# Altium PCB MainBoard.PcbDoc (part 2 of 2)
Units mil, origin at the board's own origin, x right, y up, seen from the top; angles counter-clockwise.
Board outline 6299.21 x 9187 mil, 4 copper layers (Component Side, Ground Plane, Power Plane, Solder Side), stack 33.234 mil thick; 72 components, 164 nets, 727 pads, 131 vias.
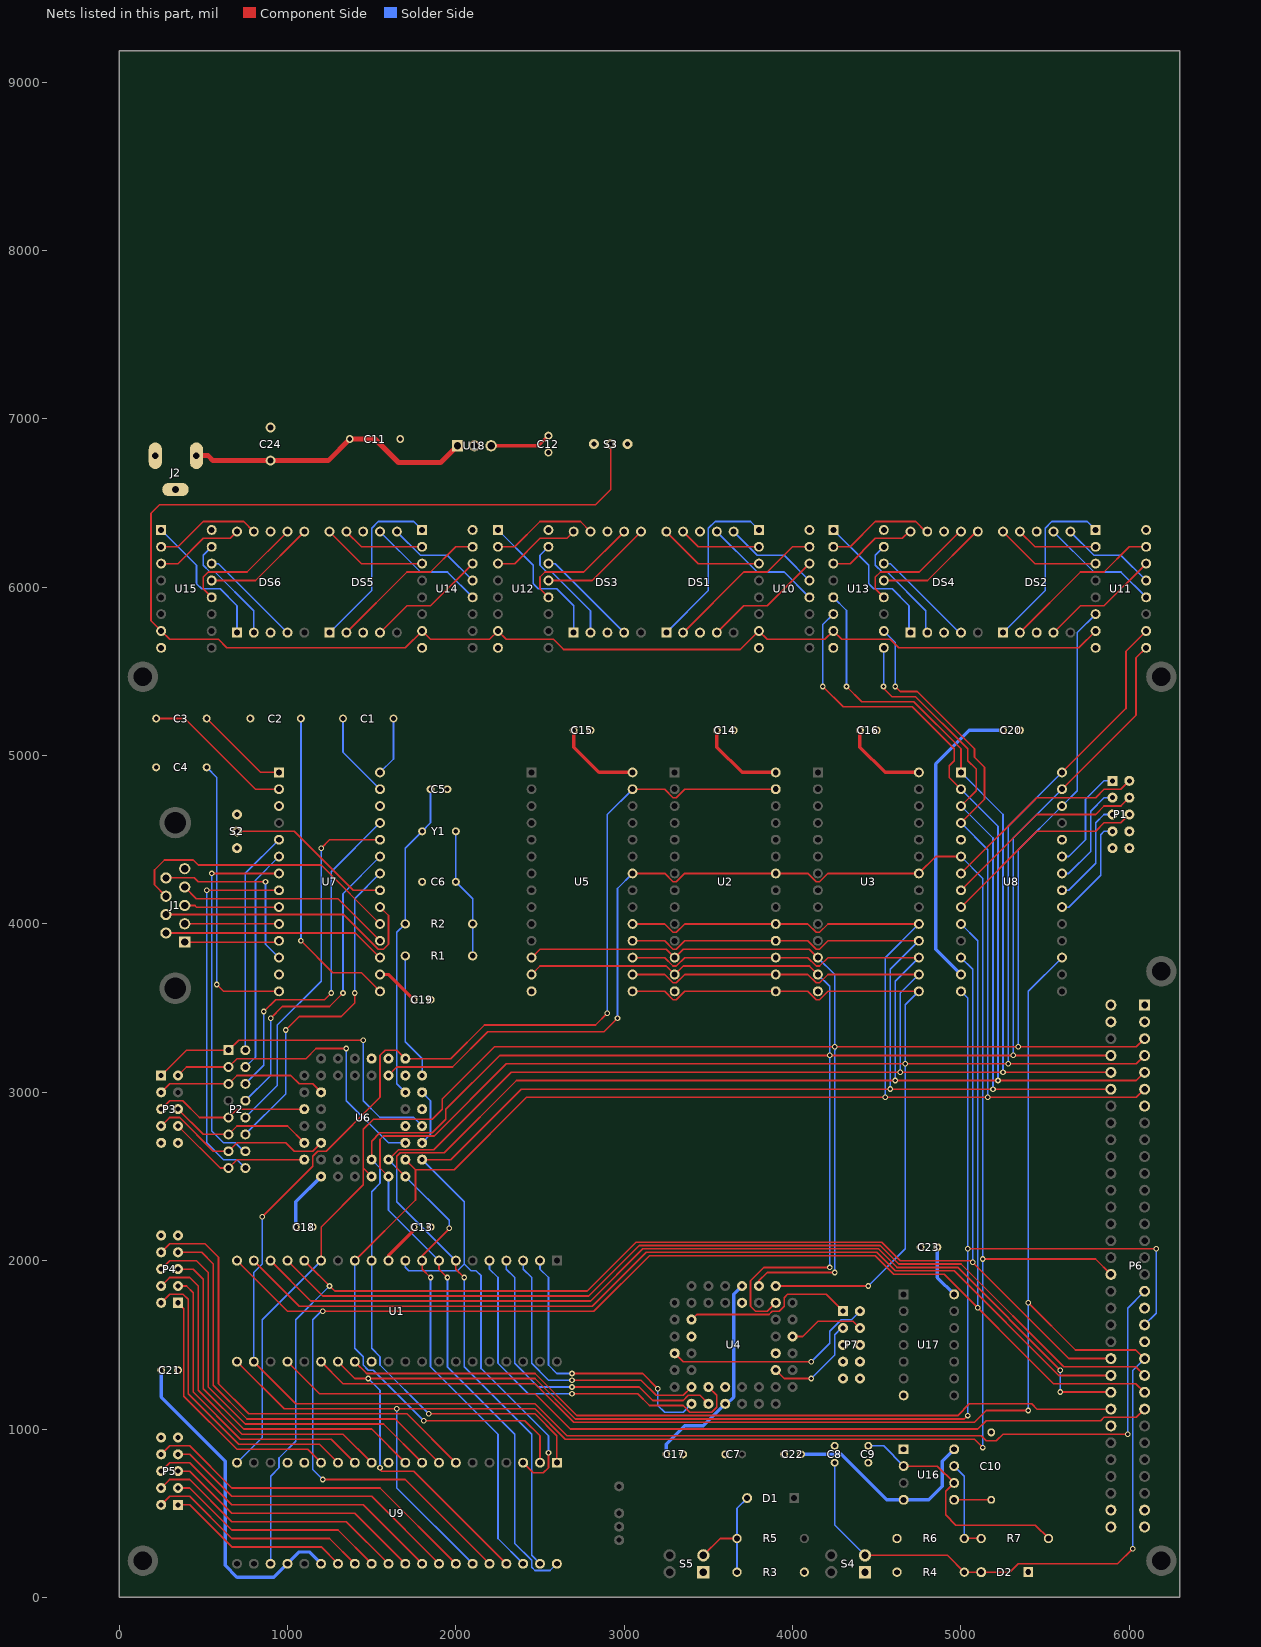
[diagram p4: the nets of this part, all layers, seen from the top]

## Via types
v1: diameter 33.46, hole 19.68, Component Side to Solder Side, 131 vias

## Nets (pads, with @x,y where several pads share a name; then routed paths per layer and width w, separated by ;. In a path a pad name is that pad's centre, name@x,y a point inside that pad or via, vN(x,y) a via of type N, cw(c..) or ccw(c..) an arc to the next point about the centre after c; other vN are vias at no path point) (continued)
D1: P6.A3 U1.15 U2.12 U3.12 U4.42 U5.12 U6.2 U8.26 U9.20 U11.6 | length 14223.9
  Component Side w10: U1.15@1200,2000 1200,2200 1450,2450 1450,2550 ; U6.2@1500,2500 1450,2550 ; U5.12@2450,3800 2500,3850 3250,3850 U2.12@3300,3800 3350,3850 4100,3850 U3.12@4150,3800 ; U4.42@3800,1850 3800,1880 3850,1930 v1(4250,1930) ; P6.A3@6090.55,3318.5 6042.05,3270 v1(4250,3270) 2230,3270 1920,2960 1920,2900 1860.91,2840.91 1510.91,2840.91 1450,2780 1450,2550
  Solder Side w10: U9.20@700,800 850,950 850,1650 U1.15@1200,2000 ; U3.12@4150,3800 4250,3700 v1(4250,3270) 4260,3260 4250,3250 v1(4250,1930) ; v1(5340,3270) 5340,4440 U8.26@5600,4700 5690.43,4790.43 5690.43,5730.43 U11.6@5800,5840
D2: P6.C4 U1.12 U2.13 U3.13 U4.41 U5.13 U6.3 U8.27 U9.1 U11.9 | length 14546.9
  Component Side w10: U6.3@1500,2600 1500,2710 1549.09,2759.09 1859.09,2759.09 1940,2840 1940,2898.5 2260,3218.5 P6.C4@5890.55,3218.5 ; v1(1840,1090) 2470,1090 2600,960 U9.1@2600,800 ; U5.13@2450,3700 2500,3750 3250,3750 U2.13@3300,3700 3350,3750 4100,3750 U3.13@4150,3700 ; U4.41@3900,1750 3850,1700 3780,1700 3750,1730 3750,1880 3830,1960 v1(4220,1960) ; U8.27@5600,4800 6040,5240 6040,5580 U11.9@6100,5640
  Solder Side w10: U6.3@1500,2600 1550,2550 1550,2460 1500,2410 U1.12@1500,2000 1500,1480 1550,1430 1550,1380 v1(1840,1090) ; U3.13@4150,3700 4220,3630 v1(4220,3220) v1(4220,1960) ; v1(5310,3220) 5310,4510 U8.27@5600,4800
D3: P6.A4 U1.8 U2.15 U3.15 U4.40 U5.15 U6.4 U8.28 U9.40 U11.10 | length 14951.8
  Component Side w10: U6.4@1600,2500 1550,2550 1550,2720 1570.91,2740.91 1870.91,2740.91 2300,3170 v1(4670,3170) 6042.05,3170 P6.A4@6090.55,3218.5 ; U1.8@1900,2000 1900,1950 v1(1950,1900) ; U5.15@3050,3600 3240,3600 3290,3550 3310,3550 3360,3600 U2.15@3900,3600 4090,3600 4140,3550 4160,3550 4210,3600 U3.15@4750,3600 ; U4.40@3900,1850 v1(4450,1850) ; U8.28@5600,4900 5980,5280 5980,5620 U11.10@6100,5740
  Solder Side w10: U6.4@1600,2500 1600,2300 U1.8@1900,2000 ; v1(1950,1900) 1950,1370 2350,970 2350,320 2450,220 2450,180 2470.43,159.57 2559.57,159.57 U9.40@2600,200 ; v1(4450,1850) 4670,2070 v1(4670,3170) 4670,3520 U3.15@4750,3600 ; v1(5280,3170) 5280,4580 U8.28@5600,4900
D4: P6.C5 U1.7 U2.16 U3.16 U5.16 U6.5 U8.1 U9.39 U13.5 | length 13105.7
  Component Side w10: U6.5@1600,2600 1659.09,2659.09 1869.09,2659.09 2328.5,3118.5 P6.C5@5890.55,3118.5 ; U1.7@2000,2000 2000,1950 v1(2050,1900) ; U5.16@3050,3700 3240,3700 3290,3650 3310,3650 3360,3700 U2.16@3900,3700 4090,3700 4140,3650 4160,3650 4210,3700 U3.16@4750,3700 ; v1(4320,5410) 4410,5320 4720,5320 5000,5040 U8.1@5000,4900
  Solder Side w10: U6.5@1600,2600 1650,2550 1650,2350 U1.7@2000,2000 ; v1(2050,1900) 2050,1369.13 2450,969.13 2450,250 U9.39@2500,200 ; U13.5@4241.76,5940 4320,5861.76 v1(4320,5410) ; v1(4640,3120) 4640,3590 U3.16@4750,3700 ; U8.1@5000,4900 5250,4650 v1@5250,3120
  other v1: 5250,3118.5
D5: P6.A5 U1.9 U2.17 U3.17 U5.17 U6.6 U8.2 U9.38 U13.6 | length 13572.5
  Component Side w10: U6.6@1700,2500 1650,2550 1650,2620 1670.91,2640.91 1930.91,2640.91 2360,3070 v1(4610,3070) 6042.05,3070 P6.A5@6090.55,3118.5 ; v1(1850,1900) 1800,1950 U1.9@1800,2000 1800,2030 1960,2190 v1(1960,2192.5) ; U5.17@3050,3800 3240,3800 3290,3750 3310,3750 3360,3800 U2.17@3900,3800 4090,3800 4140,3750 4160,3750 4210,3800 U3.17@4750,3800 ; v1(4180,5410) 4300,5290 4710,5290 4960,5040 4960,4970 4930,4940 4930,4870 U8.2@5000,4800
  Solder Side w10: U6.6@1700,2500 1960,2240 v1(1960,2192.5) ; v1(1850,1900) 1850,1370 2250,970 2250,350 U9.38@2400,200 ; v1(4180,5410) 4180,5778.24 U13.6@4241.76,5840 ; v1(4610,3070) 4610,3660 U3.17@4750,3800 ; U8.2@5000,4800 5220,4580 v1(5220,3070)
D6: P6.C6 U1.10 U2.18 U3.18 U5.18 U6.7 U8.3 U9.3 U13.9 | length 12820.5
  Component Side w10: U6.7@1800,2600 1970,2600 2388.5,3018.5 P6.C6@5890.55,3018.5 ; U9.3@2400,800 2460,740 2520,740 2550,770 v1(2550,860) ; U5.18@3050,3900 3240,3900 3290,3850 3310,3850 3360,3900 U2.18@3900,3900 4090,3900 4140,3850 4160,3850 4210,3900 U3.18@4750,3900 ; v1(4540,5410) 4540,5400 4590,5350 4730,5350 5040,5040 5040,4970 5090,4920 5090,4790 U8.3@5000,4700
  Solder Side w10: U1.10@1700,2000 1700,1960 1720,1940 2010,1940 2050,1980 ; U6.7@1800,2600 2050,2350 2050,1980 ; v1(2550,860) 2550,960 2150,1360 2150,1910 2120,1940 2090,1940 2050,1980 ; v1(4540,5410) 4540,5403.52 4541.76,5401.76 U13.9@4541.76,5640 ; v1(4580,3020) 4580,3730 U3.18@4750,3900 ; U8.3@5000,4700 5190,4510 v1@5190,3020
  other v1: 5190,3018.5
D7: P6.A6 U1.13 U2.19 U3.19 U5.19 U6.8 U8.4 U9.2 U13.10 | length 13423.7
  Component Side w10: U1.13@1400,2000 1760,2360 1760,2540 ; U6.8@1700,2600 1760,2540 ; v1(1810,1050) 2410,1050 2500,960 U9.2@2500,800 ; U5.19@3050,4000 3240,4000 3290,3950 3310,3950 3360,4000 U2.19@3900,4000 4090,4000 4140,3950 4160,3950 4210,4000 U3.19@4750,4000 ; v1(4610,5410) 4640,5380 4740,5380 5080,5040 5080,4990 5140,4930 5140,4740 U8.4@5000,4600 ; P6.A6@6090.55,3018.5 6042.05,2970 v1(4550,2970) 2420,2970 1990,2540 1760,2540
  Solder Side w10: U1.13@1400,2000 1400,1480 1450,1430 1450,1380 1480,1350 1510,1350 v1(1810,1050) ; U13.10@4541.76,5740 4610,5671.76 v1(4610,5410) ; v1(4550,2970) 4550,3800 U3.19@4750,4000 ; U8.4@5000,4600 5160,4440 v1(5160,2970)
D\C\D\: P2.13 P3.7 U6.38 | length 1115.7
  Component Side w10: P3.7@250,2800 300,2850 360,2850 560,2650 P2.13@650,2650 700,2700 990,2700 1040,2650 1150,2650 U6.38@1200,2700
D\S\R\: P2.11 P3.6 U6.37 | length 874.3
  Component Side w10: P3.6@350,2900 500,2750 P2.11@650,2750 700,2800 1000,2800 U6.37@1100,2700
D\T\R\: P2.9 P3.5 U6.33 | length 932.8
  Component Side w10: P3.5@250,2900 300,2950 377.51,2950 477.51,2850 P2.9@650,2850 700,2900 U6.33@1100,2900
DB9-1: J1.1 U7.11 | length 563.4
  Component Side w10: J1.1@389.92,3891.89 941.89,3891.89 U7.11@950,3900
DB9-2: J1.2 U7.10 | length 560.5
  Component Side w10: J1.2@389.92,4000.94 949.06,4000.94 U7.10@950,4000
DB9-3: J1.3 U7.9 | length 564.2
  Component Side w10: J1.3@389.92,4110 450,4110 460,4100 U7.9@950,4100
DB9-4: J1.4 U7.18 | length 1292.2
  Component Side w10: J1.4@389.92,4219.05 458.98,4150 1300,4150 U7.18@1550,3900
DB9-5: C4.2 C5.2 C6.2 C7.1 C8.1 C9.1 C10.1 C11.1 C12.1 C13.1 C14.1 C15.1 C16.1 C17.1 C18.1 C19.1 C20.1 C21.1 C22.1 C23.1 C24.2 DS1.3 DS1.8 DS2.3 DS2.8 DS3.3 DS3.8 DS4.3 DS4.8 DS5.3 DS5.8 DS6.3 DS6.8 J1.5 J2.2 P1.8 P1.10 P3.9 P4.10 P5.10 P6.A1 P6.A7 P6.A19 P6.A21 P6.A32 P6.C1 P6.C26 P6.C32 P7.5 P7.6 P7.7 P7.8 P7.10 S2.1 S3.1 S4.1 S5.1 U1.29 U2.14 U3.14 U4.1 U4.12 U4.23 U4.34 U5.14 U6.12 U6.13 U6.19 U6.20 U6.22 U7.3 U7.13 U7.26 U8.5 U9.11 U9.16 U9.17 U10.8 U11.8 U12.8 U13.8 U14.8 U15.8 U16.1 U17.7 U18.3
DB9-6: J1.6 U7.17 | length 1332.5
  Component Side w10: J1.6@278.11,3946.42 1403.58,3946.42 U7.17@1550,3800
DB9-7: J1.7 U7.20 | length 1660.1
  Component Side w10: J1.7@278.11,4055.47 1334.53,4055.47 1540,3850 1570,3850 1600,3880 1600,4050 U7.20@1550,4100
DB9-8: J1.8 U7.19 | length 1705.9
  Component Side w10: J1.8@278.11,4164.53 210,4232.64 210,4320 270,4380 440,4380 470,4350 1200,4350 U7.19@1550,4000
DB9-9: J1.9 U7.12 | length 1084.8
  Component Side w10: J1.9@278.11,4273.58 446.42,4273.58 470,4250 v1(870,4250)
  Solder Side w10: v1(870,4250) 870,3880 U7.12@950,3800
H\A\L\T\: P6.C24 U1.18 | length 5647.2
  Component Side w10: U1.18@900,2000 1140,1760 2800,1760 3110,2070 4510,2070 4620,1960 4980,1960 v1(5590,1350) ; v1(5590,1220) 5889.06,1220 P6.C24@5890.55,1218.5
  Solder Side w10: v1(5590,1220) v1(5590,1350)
I\N\T\: P6.C22 U1.16 U8.12 U9.23 | length 8905.6
  Component Side w10: U1.16@1100,2000 1280,1820 2780,1820 3070,2110 4530,2110 4640,2000 5060,2000 5641.5,1418.5 P6.C22@5890.55,1418.5
  Solder Side w10: U9.23@900,200 900,720 950,770 950,827.61 1050,927.61 1050,1650 v1(1250,1850) ; U8.12@5000,3800 5070,3730 v1(5070,1990)
I\O\R\Q\: P6.A24 U1.20 U8.10 U9.36 | length 10561.7
  Component Side w10: U1.20@700,2000 1000,1700 v1(1210,1700) 2820,1700 3150,2030 4490,2030 4600,1920 4900,1920 5550,1270 6039.06,1270 P6.A24@6090.55,1218.5 ; v1(1210,700) 1700,700 U9.36@2200,200
  Solder Side w10: v1(1210,700) 1150,760 1150,1650 1200,1700 v1(1210,1700) ; U8.10@5000,4000 5100,3900 v1(5100,1720)
LE: S3.2 U10.7 U11.7 U12.7 U13.7 U14.7 U15.7 | length 9672.5
  Component Side w10: S3.2@2920,6850 2920,6580 2830,6490 240,6490 190,6440 190,5800 U15.7@250,5740 300,5690 590,5690 640,5640 1700,5640 U14.7@1800,5740 1850,5690 2200,5690 U12.7@2250,5740 2300,5690 2580,5690 2640,5630 3690,5630 U10.7@3800,5740 3850,5690 4191.76,5690 U13.7@4241.76,5740 4291.76,5690 4580,5690 4630,5640 5700,5640 U11.7@5800,5740
M\1\: P6.A20 U1.27 U8.14 U9.37 | length 9579
  Component Side w10: U1.27@1300,1400 1400,1300 2470,1300 2710,1060 5020,1060 v1(5040,1080) ; v1(1550,770) 1550,760 1560,750 1750,750 U9.37@2300,200 ; v1(5040,2070.24) 5042.44,2072.68 5045.12,2070 v1(6160,2070)
  Solder Side w10: v1(1480,1300) 1550,1230 v1(1550,770) ; U8.14@5000,3600 5040,3560 v1(5040,2070.24) v1(5040,1080) ; P6.A20@6090.55,1618.5 6160,1687.95 v1(6160,2070)
M\R\E\Q\: P6.C23 U1.19 | length 5637.9
  Component Side w10: U1.19@800,2000 1070,1730 2810,1730 3130,2050 4500,2050 4610,1940 4960,1940 5581.5,1318.5 P6.C23@5890.55,1318.5
MMU_A12: U1.2 U4.18 | length 1686
  Component Side w10: v1(2690,1330) 3110,1330 v1(3200,1240)
  Solder Side w10: U1.2@2500,2000 2500,1950 2550,1900 2550,1380 2600,1330 v1(2690,1330) ; v1(3200,1240) 3200,1140 3240,1100 3350,1100 U4.18@3400,1150
MMU_A13: U1.3 U4.19 | length 1680.1
  Component Side w10: v1(2690,1290) 3100,1290 3190,1200 3350,1200 U4.19@3400,1250
  Solder Side w10: U1.3@2400,2000 2400,1950 2450,1900 2450,1390 2550,1290 v1(2690,1290)
MMU_A14: U1.4 U4.20 | length 1905
  Component Side w10: v1(2690,1250) 3090,1250 3170,1170 3350,1170 3380,1200 3450,1200 U4.20@3500,1150
  Solder Side w10: U1.4@2300,2000 2300,1950 2350,1900 2350,1390 2490,1250 v1(2690,1250)
MMU_A15: U1.5 U4.21 | length 2204
  Component Side w10: v1(2690,1210) 3080,1210 3150,1140 3350,1140 3390,1100 3520,1100 3550,1130 3550,1200 U4.21@3500,1250
  Solder Side w10: U1.5@2200,2000 2200,1950 2250,1900 2250,1390 2430,1210 v1(2690,1210)
NetC1_1: C1.1 U7.28 | length 353.1
  Solder Side w10: U7.28@1550,4900 1630,4980 C1.1@1630,5220
NetC1_2: C1.2 U7.27 | length 511.1
  Solder Side w10: C1.2@1330,5220 1330,5020 U7.27@1550,4800
NetC2_1: C2.1 U7.15 | length 1914.3
  Component Side w10: v1(1080,3900) 1270,3710 1440,3710 U7.15@1550,3600
  Solder Side w10: v1(1080,3900) C2.1@1080,5220
NetC3_1: C3.1 U7.2 | length 904
  Component Side w10: C3.1@220,5220 390,5220 810,4800 U7.2@950,4800
NetC3_2: C3.2 U7.1 | length 562.5
  Component Side w10: C3.2@520,5220 840,4900 U7.1@950,4900
NetC4_1: C4.1 U7.14 | length 1701.4
  Component Side w10: v1(580,3640) 620,3600 U7.14@950,3600
  Solder Side w10: C4.1@520,4930 580,4870 v1(580,3640)
NetC5_1: C5.1 R2.2 U6.16 Y1.1 | length 1903.6
  Solder Side w10: U6.16@1700,3000 1650,3050 1650,3950 R2.2@1700,4000 1700,4450 Y1.1@1800,4550 1850,4600 C5.1@1850,4800
NetC6_1: C6.1 R1.1 R2.1 Y1.2 | length 781.4
  Solder Side w10: Y1.2@2000,4550 C6.1@2000,4250 2100,4150 R2.1@2100,4000 R1.1@2100,3810
NetC9_2: C9.2 R7.1 U16.2 U16.6 | length 1479.8
  Component Side w7.87: U16.2@4660,780 4860,780 U16.6@4960,680 4910,630 4910,490 4970,430 5440,430 R7.1@5520,350
  Solder Side w7.87: C9.2@4450,900 4540,900 U16.2@4660,780
NetC10_2: C10.2 U16.5 | length 220
  Component Side w10: U16.5@4960,580 C10.2@5180,580
NetC11_2: C11.2 C24.1 J2.1 U18.1 | length 1715.3
  Component Side w30: J2.1@459.37,6780.79 529.21,6780.79 558.43,6751.57 C24.1@900,6751.57 1241.57,6751.57 C11.2@1370,6880 1520,6880 1660,6740 1910,6740 U18.1@2010,6840
NetD1_1: D1.1 R3.1 R5.1 S5.2 | length 706.4
  Component Side w10: S5.2@3470,250 3570,350 R5.1@3670,350
  Solder Side w10: R3.1@3670,150 R5.1@3670,350 3670,529.76 D1.1@3730.24,590
NetDS1_1: DS1.1 U10.1 | length 1060.8
  Solder Side w10: DS1.1@3250,5730 3500,5980 3500,6350 3540,6390 3750,6390 U10.1@3800,6340
NetDS1_2: DS1.2 U10.15 | length 961.2
  Component Side w10: DS1.2@3350,5730 3710,6090 3850,6090 4000,6240 U10.15@4100,6240
NetDS1_4: DS1.4 U10.14 | length 719.8
  Component Side w10: DS1.4@3550,5730 3710,5890 3850,5890 U10.14@4100,6140
NetDS1_6: DS1.6 U10.13 | length 570.1
  Solder Side w10: DS1.6@3650,6330 3790,6190 3950,6190 U10.13@4100,6040
NetDS1_7: DS1.7 U10.12 | length 711.5
  Solder Side w10: DS1.7@3550,6330 3790,6090 3950,6090 U10.12@4100,5940
NetDS1_9: DS1.9 U10.2 | length 487.3
  Component Side w10: DS1.9@3350,6330 3440,6240 U10.2@3800,6240
NetDS1_10: DS1.10 U10.3 | length 628.7
  Component Side w10: DS1.10@3250,6330 3440,6140 U10.3@3800,6140
NetDS2_1: DS2.1 U11.1 | length 1060.8
  Solder Side w10: DS2.1@5250,5730 5500,5980 5500,6350 5540,6390 5750,6390 U11.1@5800,6340
NetDS2_2: DS2.2 U11.15 | length 961.2
  Component Side w10: DS2.2@5350,5730 5710,6090 5850,6090 6000,6240 U11.15@6100,6240
NetDS2_4: DS2.4 U11.14 | length 719.8
  Component Side w10: DS2.4@5550,5730 5710,5890 5850,5890 U11.14@6100,6140
NetDS2_6: DS2.6 U11.13 | length 570.1
  Solder Side w10: DS2.6@5650,6330 5790,6190 5950,6190 U11.13@6100,6040
NetDS2_7: DS2.7 U11.12 | length 711.5
  Solder Side w10: DS2.7@5550,6330 5790,6090 5950,6090 U11.12@6100,5940
NetDS2_9: DS2.9 U11.2 | length 487.3
  Component Side w10: DS2.9@5350,6330 5440,6240 U11.2@5800,6240
NetDS2_10: DS2.10 U11.3 | length 628.7
  Component Side w10: DS2.10@5250,6330 5440,6140 U11.3@5800,6140
NetDS3_1: DS3.1 U12.1 | length 860.8
  Solder Side w10: U12.1@2250,6340 2460,6130 2460,6020 2490,5990 2600,5990 2700,5890 DS3.1@2700,5730
NetDS3_2: DS3.2 U12.15 | length 672.5
  Solder Side w10: U12.15@2550,6240 2500,6190 2500,6130 2540,6090 2570,6090 2800,5860 DS3.2@2800,5730
NetDS3_4: DS3.4 U12.14 | length 619.8
  Solder Side w10: U12.14@2550,6140 2590,6140 DS3.4@3000,5730
NetDS3_6: DS3.6 U12.13 | length 670.1
  Component Side w10: U12.13@2550,6040 2810,6040 DS3.6@3100,6330
NetDS3_7: DS3.7 U12.12 | length 752.5
  Component Side w10: U12.12@2550,5940 2500,5990 2500,6060 2530,6090 2760,6090 DS3.7@3000,6330
NetDS3_9: DS3.9 U12.2 | length 637
  Component Side w10: U12.2@2250,6240 2350,6240 2500,6390 2740,6390 DS3.9@2800,6330
NetDS3_10: DS3.10 U12.3 | length 528.7
  Component Side w10: U12.3@2250,6140 2350,6140 2500,6290 2660,6290 DS3.10@2700,6330
NetDS4_1: DS4.1 U13.1 | length 860.8
  Solder Side w10: U13.1@4241.76,6340 4451.76,6130 4451.76,6020 4481.76,5990 4591.76,5990 4691.76,5890 DS4.1@4691.76,5730
NetDS4_2: DS4.2 U13.15 | length 672.5
  Solder Side w10: U13.15@4541.76,6240 4491.76,6190 4491.76,6130 4531.76,6090 4561.76,6090 4791.76,5860 DS4.2@4791.76,5730
NetDS4_4: DS4.4 U13.14 | length 619.8
  Solder Side w10: U13.14@4541.76,6140 4581.76,6140 DS4.4@4991.76,5730
NetDS4_6: DS4.6 U13.13 | length 670.1
  Component Side w10: U13.13@4541.76,6040 4801.76,6040 DS4.6@5091.76,6330
NetDS4_7: DS4.7 U13.12 | length 752.5
  Component Side w10: U13.12@4541.76,5940 4491.76,5990 4491.76,6060 4521.76,6090 4751.76,6090 DS4.7@4991.76,6330
NetDS4_9: DS4.9 U13.2 | length 637
  Component Side w10: U13.2@4241.76,6240 4341.76,6240 4491.76,6390 4731.76,6390 DS4.9@4791.76,6330
NetDS4_10: DS4.10 U13.3 | length 528.7
  Component Side w10: U13.3@4241.76,6140 4341.76,6140 4491.76,6290 4651.76,6290 DS4.10@4691.76,6330
NetDS5_1: DS5.1 U14.1 | length 1060.8
  Solder Side w10: DS5.1@1250,5730 1500,5980 1500,6350 1540,6390 1750,6390 U14.1@1800,6340
NetDS5_2: DS5.2 U14.15 | length 961.2
  Component Side w10: DS5.2@1350,5730 1710,6090 1850,6090 2000,6240 U14.15@2100,6240
NetDS5_4: DS5.4 U14.14 | length 719.8
  Component Side w10: DS5.4@1550,5730 1710,5890 1850,5890 U14.14@2100,6140
NetDS5_6: DS5.6 U14.13 | length 570.1
  Solder Side w10: DS5.6@1650,6330 1790,6190 1950,6190 U14.13@2100,6040
NetDS5_7: DS5.7 U14.12 | length 711.5
  Solder Side w10: DS5.7@1550,6330 1790,6090 1950,6090 U14.12@2100,5940
NetDS5_9: DS5.9 U14.2 | length 487.3
  Component Side w10: DS5.9@1350,6330 1440,6240 U14.2@1800,6240
NetDS5_10: DS5.10 U14.3 | length 628.7
  Component Side w10: DS5.10@1250,6330 1440,6140 U14.3@1800,6140
NetDS6_1: DS6.1 U15.1 | length 860.8
  Solder Side w10: U15.1@250,6340 460,6130 460,6020 490,5990 600,5990 700,5890 DS6.1@700,5730
NetDS6_2: DS6.2 U15.15 | length 672.5
  Solder Side w10: U15.15@550,6240 500,6190 500,6130 540,6090 570,6090 800,5860 DS6.2@800,5730
NetDS6_4: DS6.4 U15.14 | length 619.8
  Solder Side w10: U15.14@550,6140 590,6140 DS6.4@1000,5730
NetDS6_6: DS6.6 U15.13 | length 670.1
  Component Side w10: U15.13@550,6040 810,6040 DS6.6@1100,6330
NetDS6_7: DS6.7 U15.12 | length 752.5
  Component Side w10: U15.12@550,5940 500,5990 500,6060 530,6090 760,6090 DS6.7@1000,6330
NetDS6_9: DS6.9 U15.2 | length 637
  Component Side w10: U15.2@250,6240 350,6240 500,6390 740,6390 DS6.9@800,6330
NetDS6_10: DS6.10 U15.3 | length 528.7
  Component Side w10: U15.3@250,6140 350,6140 500,6290 660,6290 DS6.10@700,6330
NetJ2_3: J2.3
NetP1_1: P1.1 U8.23 | length 627
  Solder Side w10: U8.23@5600,4400 5640,4400 5740,4500 5740,4740 5850,4850 P1.1@5900,4850
NetP1_2: P1.2 U8.7 | length 1227.8
  Component Side w10: U8.7@5000,4300 5450,4750 5800,4750 5850,4800 5950,4800 P1.2@6000,4850
NetP1_3: P1.3 U8.22 | length 627
  Solder Side w10: U8.22@5600,4300 5640,4300 5770,4430 5770,4670 5850,4750 P1.3@5900,4750
NetP1_4: P1.4 U8.8 | length 1227.8
  Component Side w10: U8.8@5000,4200 5450,4650 5800,4650 5850,4700 5950,4700 P1.4@6000,4750
NetP1_5: P1.5 U8.21 | length 627
  Solder Side w10: U8.21@5600,4200 5640,4200 5800,4360 5800,4600 5850,4650 P1.5@5900,4650
NetP1_6: P1.6 U8.9 | length 1227.8
  Component Side w10: U8.9@5000,4100 5450,4550 5800,4550 5850,4600 5950,4600 P1.6@6000,4650
NetP1_7: P1.7 U8.20 | length 627
  Solder Side w10: U8.20@5600,4100 5640,4100 5830,4290 5830,4530 5850,4550 P1.7@5900,4550
NetP2_2: P2.2 U7.5 | length 1332.8
  Solder Side w10: P2.2@750,3250 750,4300 U7.5@950,4500
NetP2_4: P2.4 U7.6 | length 1332.8
  Solder Side w10: P2.4@750,3150 810,3210 810,4260 U7.6@950,4400
NetP2_6: P2.6 U7.25 | length 2051.2
  Component Side w10: v1(860,3480) 930,3550 1220,3550 v1(1260,3590)
  Solder Side w10: P2.6@750,3050 860,3160 v1(860,3480) ; v1(1260,3590) 1260,4310 U7.25@1550,4600
NetP2_8: P2.8 U7.23 | length 1945.4
  Component Side w10: v1(900,3440) 970,3510 1250,3510 v1(1330,3590)
  Solder Side w10: P2.8@750,2950 900,3100 v1(900,3440) ; v1(1330,3590) 1330,4180 U7.23@1550,4400
NetP2_10: P2.10 U7.24 | length 2157.1
  Component Side w10: v1(1200,4450) 1250,4500 U7.24@1550,4500
  Solder Side w10: P2.10@750,2850 940,3040 940,3400 1200,3660 v1(1200,4450)
NetP2_12: P2.12 U7.22 | length 2027.8
  Component Side w10: v1(990,3370) 1070,3450 1320,3450 1400,3530 v1(1400,3590)
  Solder Side w10: P2.12@750,2750 990,2990 v1(990,3370) ; v1(1400,3590) 1400,4150 U7.22@1550,4300
NetP2_14: P2.14 U7.7 | length 2179.7
  Component Side w10: v1(550,4300) U7.7@950,4300
  Solder Side w10: v1(550,4300) 550,2770 620,2700 690,2700 740,2650 P2.14@750,2650
NetP2_16: P2.16 U7.8 | length 2222.1
  Component Side w10: v1(520,4200) U7.8@950,4200
  Solder Side w10: v1(520,4200) 520,2700 620,2600 700,2600 P2.16@750,2550
NetP4_1: P4.1 U9.15 | length 1548.1
  Component Side w10: P4.1@350,1750 384.53,1715.47 384.53,1195.47 700,880 1120,880 U9.15@1200,800
NetP4_2: P4.2 U9.14 | length 1813
  Component Side w10: P4.2@250,1750 300,1800 380,1800 410,1770 410,1210 710,910 1190,910 U9.14@1300,800
NetP4_3: P4.3 U9.13 | length 1830.5
  Component Side w10: P4.3@350,1850 400,1850 440,1810 440,1220 720,940 1260,940 U9.13@1400,800
NetP4_4: P4.4 U9.12 | length 2089.5
  Component Side w10: P4.4@250,1850 300,1900 420,1900 470,1850 470,1230 730,970 1330,970 U9.12@1500,800
NetP4_5: P4.5 U9.10 | length 2207.1
  Component Side w10: P4.5@350,1950 440,1950 500,1890 500,1240 740,1000 1500,1000 U9.10@1700,800
NetP4_6: P4.6 U9.9 | length 2466.1
  Component Side w10: P4.6@250,1950 300,2000 460,2000 530,1930 530,1250 750,1030 1570,1030 U9.9@1800,800
NetP4_7: P4.7 U9.8 | length 2489.5
  Component Side w10: P4.7@350,2050 490,2050 560,1980 560,1260 760,1060 1640,1060 U9.8@1900,800
NetP4_8: P4.8 U9.7 | length 2748.5
  Component Side w10: P4.8@250,2050 300,2100 510,2100 590,2020 590,1270 770,1090 1710,1090 U9.7@2000,800
NetP5_1: P5.1 U9.27 | length 1095
  Component Side w10: P5.1@350,550 420,550 670,300 1200,300 U9.27@1300,200
NetP5_2: P5.2 U9.28 | length 1336.4
  Component Side w10: P5.2@250,550 300,600 420,600 670,350 1250,350 U9.28@1400,200
NetP5_3: P5.3 U9.29 | length 1336.4
  Component Side w10: P5.3@350,650 420,650 670,400 1300,400 U9.29@1500,200
NetP5_4: P5.4 U9.30 | length 1577.8
  Component Side w10: P5.4@250,650 300,700 420,700 670,450 1350,450 U9.30@1600,200
NetP5_5: P5.5 U9.31 | length 1577.8
  Component Side w10: P5.5@350,750 420,750 670,500 1400,500 U9.31@1700,200
NetP5_6: P5.6 U9.32 | length 1819.2
  Component Side w10: P5.6@250,750 300,800 420,800 670,550 1450,550 U9.32@1800,200
NetP5_7: P5.7 U9.33 | length 1819.2
  Component Side w10: P5.7@350,850 420,850 670,600 1500,600 U9.33@1900,200
NetP5_8: P5.8 U9.34 | length 2060.7
  Component Side w10: P5.8@250,850 300,900 420,900 670,650 1550,650 U9.34@2000,200
NetR1_2: R1.2 U6.17 | length 751.4
  Solder Side w10: R1.2@1700,3810 1700,3300 1800,3200 U6.17@1800,3100
NetR6_1: R6.1 R7.2 U16.7 | length 554.9
  Component Side w7.87: R6.1@5020,350 R7.2@5120,350
  Solder Side w7.87: U16.7@4960,780 5020,720 R6.1@5020,350
NetS2_2: S2.2 U7.21 | length 995
  Component Side w10: S2.2@700,4550 1040,4550 1390,4200 U7.21@1550,4200
NetU6_9: U6.9 U6.15 | length 341.4
  Solder Side w10: U6.9@1800,2700 1850,2750 1850,2950 U6.15@1800,3000
NMI: P6.A23 U1.17 | length 5621.4
  Component Side w10: U1.17@1000,2000 1210,1790 2790,1790 3090,2090 4520,2090 4630,1980 5000,1980 5610,1370 6039.06,1370 P6.A23@6090.55,1318.5
R\D\: P6.C17 U1.21 U2.22 U3.22 U5.22 U6.21 U8.6 U9.35 | length 14582.3
  Component Side w10: U1.21@700,1400 980,1120 2470,1120 2650,940 5080,940 v1(5130,890) ; U6.21@1600,3100 1650,3150 1980,3150 2190,3360 2880,3360 v1(2960,3440) ; U5.22@3050,4300 3240,4300 3290,4250 3310,4250 3360,4300 U2.22@3900,4300 4090,4300 4140,4250 4160,4250 4210,4300 U3.22@4750,4300 4850,4400 U8.6@5000,4400 ; v1(5130,2010) 5799.06,2010 P6.C17@5890.55,1918.5
  Solder Side w10: v1(1650,1120) 1650,650 U9.35@2100,200 ; v1(2960,3440) 2960,4210 U5.22@3050,4300 ; U8.6@5000,4400 5130,4270 v1(5130,2010) v1(5130,890)
R\F\S\H\: P6.C25 U1.28 | length 4665.1
  Component Side w10: U1.28@1400,1400 1470,1330 2470,1330 2720,1080 4980,1080 5050,1150 5420,1150 5451.5,1118.5 P6.C25@5890.55,1118.5
R\I\: P2.15 P3.8 U6.39 | length 874.3
  Component Side w10: P3.8@350,2800 600,2550 P2.15@650,2550 700,2600 U6.39@1100,2600
R\S\T\: C8.2 D2.1 P6.A22 R4.1 S4.2 U1.26 U8.17 | length 11450.5
  Component Side w10: U1.26@1200,1400 1330,1270 2470,1270 2700,1040 5080,1040 5150,1110 v1(5400,1110) ; S4.2@4430,250 4920,250 R4.1@5020,150 D2.1@5120.24,150 5290,150 5340,200 5930,200 v1(6020,290) ; v1(5400,1750) 5680,1470 6039.06,1470 P6.A22@6090.55,1418.5
  Solder Side w10: C8.2@4250,800 4250,430 S4.2@4430,250 ; v1(5400,1110) v1(5400,1750) 5400,3600 U8.17@5600,3800 ; v1(6020,290) 6020,1347.95 P6.A22@6090.55,1418.5
R\T\S\: P2.5 P3.3 U6.32 | length 1032.8
  Component Side w10: P3.3@250,3000 300,3050 P2.5@650,3050 700,3100 1020,3100 1070,3050 1150,3050 U6.32@1200,3000
RXD: P2.3 P3.2 U6.10 | length 1829.8
  Component Side w10: P3.2@350,3100 400,3150 P2.3@650,3150 700,3200 1110,3200 1170,3260 v1(1350,3260)
  Solder Side w10: v1(1350,3260) 1350,2950 1600,2700 U6.10@1700,2700
TCK: P7.2 U4.13 | length 1285.4
  Component Side w10: U4.13@3300,1450 3350,1400 v1@4100,1400 ; v1@4109.09,1390.91 4110,1391.81 v1(4110,1400)
  Solder Side w10: v1(4110,1400) 4220,1510 4220,1580 4290,1650 4350,1650 P7.2@4400,1700
TDI: P7.1 U4.10 | length 1032.8
  Component Side w10: U4.10@3400,1650 3430,1680 3730,1680 3860,1680 3880,1700 3920,1700 3950,1730 3950,1780 3970,1800 4200,1800 P7.1@4300,1700
TDO: P7.4 U4.35 | length 454.6
  Component Side w10: U4.35@4000,1550 4060,1550 4150.91,1640.91 4359.09,1640.91 P7.4@4400,1600
TMS: P7.3 U4.32 | length 615.3
  Component Side w10: U4.32@3900,1350 3950,1300 v1(4110,1300)
  Solder Side w10: v1(4110,1300) 4250,1440 4250,1560 4290,1600 P7.3@4300,1600
TXD: P2.1 P3.1 U6.11 | length 2059.1
  Component Side w10: P3.1@250,3100 400,3250 P2.1@650,3250 710,3310 v1(1450,3310)
  Solder Side w10: v1(1450,3310) 1450,2950 1550,2850 1750,2850 U6.11@1800,2800
VCC: C2.2 C12.2 C13.2 C14.2 C15.2 C16.2 C17.2 C18.2 C19.2 C20.2 C21.2 C22.2 C23.2 D2.2 P1.9 P3.10 P4.9 P5.9 P6.A2 P6.A31 P6.C2 P6.C31 P7.9 R3.2 R4.2 R6.2 S2.3 S3.3 U1.DEC11 U2.DEC28 U3.DEC28 U4.DEC22 U4.DEC44 U5.DEC28 U6.DEC40 U7.DEC16 U8.24 U8.DEC13 U9.DEC24 U9.DEC26 U10.16 U11.16 U12.16 U13.16 U14.16 U15.16 U16.8 U16.DEC4 U17.DEC14 U18.DEC2 | length 9402.2
  Component Side w20: U7.DEC16@1550,3700 1600,3700 C19.2@1750,3550 ; U1.DEC11@1600,2000 1600,2030 1750,2180 C13.2@1750,2200 ; U18.DEC2@2210,6840 2490,6840 C12.2@2550,6900 ; C15.2@2700,5150 2700,5050 2850,4900 U5.DEC28@3050,4900 ; C14.2@3550,5150 3550,5050 3700,4900 U2.DEC28@3900,4900 ; C16.2@4400,5150 4400,5050 4550,4900 U3.DEC28@4750,4900
  Solder Side w10: U4.DEC22@3600,1150 U4.DEC22@3610,1150
  Solder Side w20: C21.2@250,1350 250,1190 630,810 630,190 700,120 920,120 U9.DEC24@1000,200 1070,270 1130,270 U9.DEC26@1200,200 ; C18.2@1050,2200 1050,2350 U6.DEC40@1200,2500 ; C17.2@3250,850 3250,910 3360,1020 3470,1020 U4.DEC22@3600,1150 ; U4.DEC22@3610,1150 3650,1190 3650,1800 U4.DEC44@3700,1850 ; C22.2@4050,850 4290,850 4560,580 U16.DEC4@4660,580 4810,580 4890,660 4890,810 U16.8@4960,880 ; C23.2@4860,2080 4860,1900 U17.DEC14@4960,1800 ; U8.DEC13@5000,3700 4850,3850 4850,4950 5050,5150 C20.2@5250,5150
W\A\I\T\: P6.A25 U1.24 | length 5305.3
  Component Side w10: U1.24@1000,1400 1190,1210 2470,1210 2680,1000 5100,1000 5150,1050 5830,1050 5850,1070 6042.05,1070 P6.A25@6090.55,1118.5
W\R\: P6.A18 U1.22 U2.27 U5.27 U6.18 | length 12229.9
  Component Side w10: U1.22@800,1400 1050,1150 2470,1150 2660,960 5120,960 5150,930 5210,930 5250,970 v1(5990,970) ; v1(850,2260) 1150,2560 1150,2620 1180,2650 1230,2650 1550,2970 1550,3220 1580,3250 1650,3250 U6.18@1700,3200 1970,3200 2170,3400 2830,3400 v1(2900,3470) ; U5.27@3050,4800 3240,4800 3290,4750 3310,4750 3360,4800 U2.27@3900,4800
  Solder Side w10: U1.22@800,1400 800,1930 850,1980 v1(850,2260) ; v1(2900,3470) 2900,4650 U5.27@3050,4800 ; v1(5990,970) 5990,1717.95 P6.A18@6090.55,1818.5
pads on no net: DS1.5 DS2.5 DS3.5 DS4.5 DS5.5 DS6.5 J1.10 J1.11 P6.33 P6.34 P6.A16 P6.A17 P6.A26 P6.A27 P6.A28 P6.A29 P6.A30 P6.C15 P6.C16 P6.C18 P6.C19 P6.C20 P6.C21 P6.C30 S4.3 S4.4 S5.3 S5.4 U2.1 U2.26 U3.27 U4.30 U4.31 U5.1 U5.26 U6.23 U6.24 U6.25 U6.29 U6.30 U6.31 U6.34 U6.35 U6.41 U6.42 U6.43 U6.44 U7.4 U8.11 U9.18 U9.21 U9.22 U10.4 U10.11 U11.4 U11.11 U12.4 U12.11 U13.4 U13.11 U14.4 U14.11 U15.4 U15.11 U17.1 U17.2 U17.3 U17.4 U17.5 U17.6 U17.9 U17.10 U17.11 U17.12 U17.13

## Polygon pours and split planes (outlines as drawn)
DB9-5 on Ground Plane (split plane): 6279.12,20.1 20.1,20.1 20.1,9166.9 6279.12,9166.9
VCC on Power Plane (split plane): 6279.12,20.1 20.1,20.1 20.1,9166.9 6279.12,9166.9

## Silkscreen, mask and mechanical layers (free items; w line width, h text height)
Top Overlay:
  text "address high" at 600,5450 h200
  text "address low" at 2600,5450 h200
  text "DATA" at 4940,5440 h200
  text "ROMH" at 2800,4050 h200 r90
  text "ROML" at 3650,4050 h200 r90
  text "RAM" at 4530,4050 h200 r90
  text "CTC" at 5370,4050 h200 r90
  text "Z80uPC" at 2470,2570 h900
  text "Naoki Pross 3E - SAM Bellinzona  2017" at 2470,2440 h60
  text "z80 CPU" at 1300,1640 h200
  text "CLK" at 3200,450 h200
  text "RST" at 4150,450 h200
  text "PIO" at 1530,420 h200

## Dimensions
6190.55,218.5 to 6299.21,-305.28 on Mechanical 1
6190.55,3718.5 to 6300,5470 on Mechanical 1
6190.55,218.5 to 6190.55,3718.5 on Mechanical 1
6190.55,218.5 to 6299.21,0 on Mechanical 1
0,0 to 6299.21,0 on Mechanical 1
0,9187 to 0,0 on Mechanical 1

## Text inside footprints (layer, text, board x,y; h text height)
J1: Top Overlay "1" at 525.94,3882.05 h59.06 r90; Top Overlay "5" at 525.94,4308.43 h59.06 r90; Top Overlay "9" at 155.87,4253.9 h59.06 r90; Top Overlay "6" at 155.87,3926.73 h59.06 r90
J2: Mechanical 1 "Alert PCB fab to slot details" at -68.74,7018.81 h11.81; Mechanical 1 "Assign keep-out area to slot" at -68.74,7038.5 h11.81; Mechanical 1 "Mech 1 - Slot cut-out" at -68.74,6999.13 h11.81; Mechanical 1 "Mech 2 - Clearance, move to internal plane if present" at -68.74,6979.44 h11.81
P1: Top Overlay "10" at 5965,4395 h60 r270; Top Overlay "1" at 5870,4935 h60 r270
P2: Top Overlay "16" at 730,2490 h50 r270; Top Overlay "15" at 630,2490 h50 r270; Top Overlay "1" at 630,3350 h50 r270; Top Overlay "2" at 730,3350 h50 r270
P3: Top Overlay "10" at 315,2645 h60 r270; Top Overlay "1" at 220,3185 h60 r270
P4: Top Overlay "10" at 285,2205 h60 r90; Top Overlay "1" at 380,1665 h60 r90
P5: Top Overlay "10" at 285,1005 h60 r90; Top Overlay "1" at 380,465 h60 r90
P6: Mechanical 1 "PCB Edge" at 6318.9,3798.03 h23.62 r270; Top Overlay "21" at 5784.25,1567.72 h59.06 r270; Top Overlay "11" at 5784.25,2552.95 h59.06 r270; Top Overlay "32" at 5784.25,467.72 h59.06 r270; Top Overlay "c" at 5870.87,3605.51 h59.06 r270; Top Overlay "a" at 6070.87,3605.51 h59.06 r270; Top Overlay "1" at 5784.25,3528.35 h59.06 r270
P7: Top Overlay "10" at 4365,1245 h60 r270; Top Overlay "1" at 4270,1785 h60 r270
U18: Top Overlay "1" at 2000.16,6695.31 h59.06; Top Overlay "2" at 2190.32,6695.31 h59.06; Top Overlay "3" at 2090.31,6695.31 h59.06